# Altium PCB main-pcb.PcbDoc
Units mm, origin at the board's own origin, x right, y up, seen from the top; angles counter-clockwise.
Board outline 36.83 x 18.16 mm, 2 copper layers (Top Layer, Bottom Layer); 12 components, 10 nets, 45 pads, 6 vias.
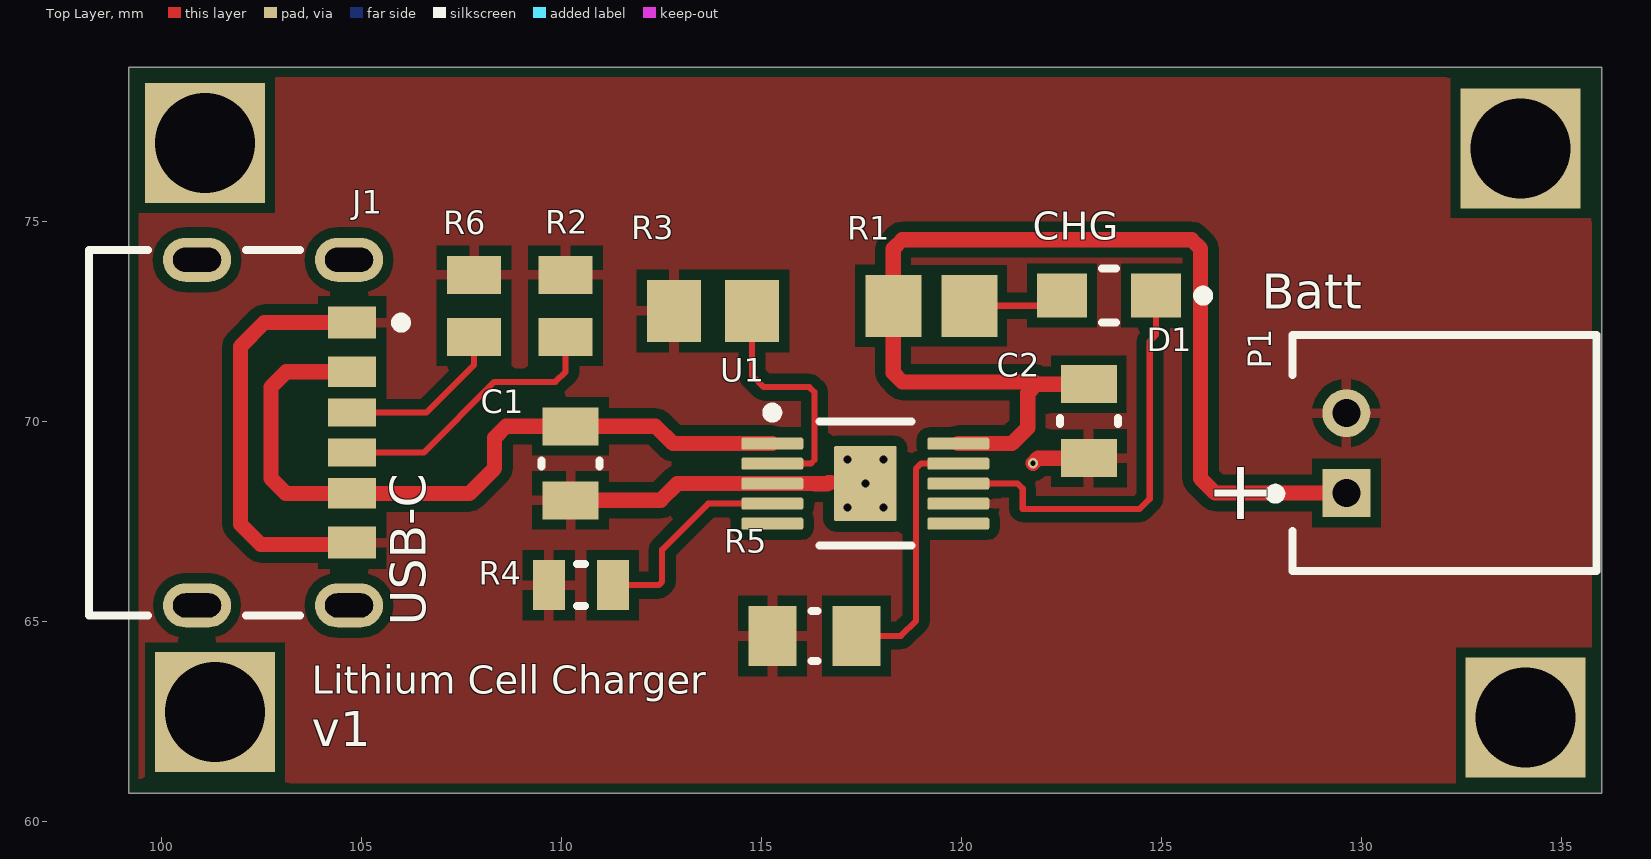
[diagram p0: Top Layer view]
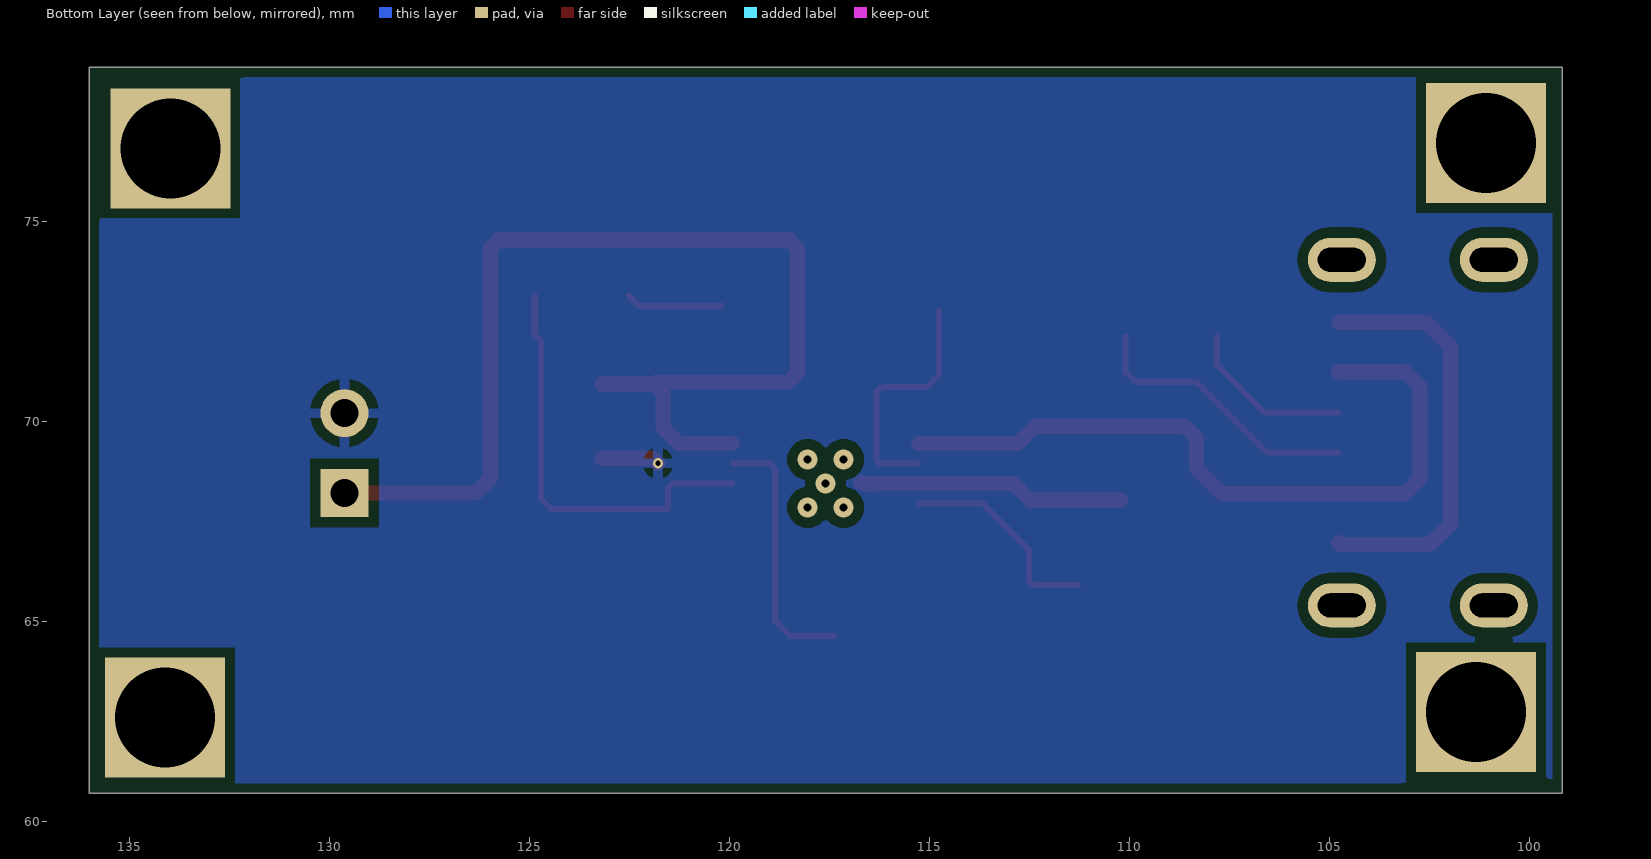
[diagram p1: Bottom Layer view, seen from below]
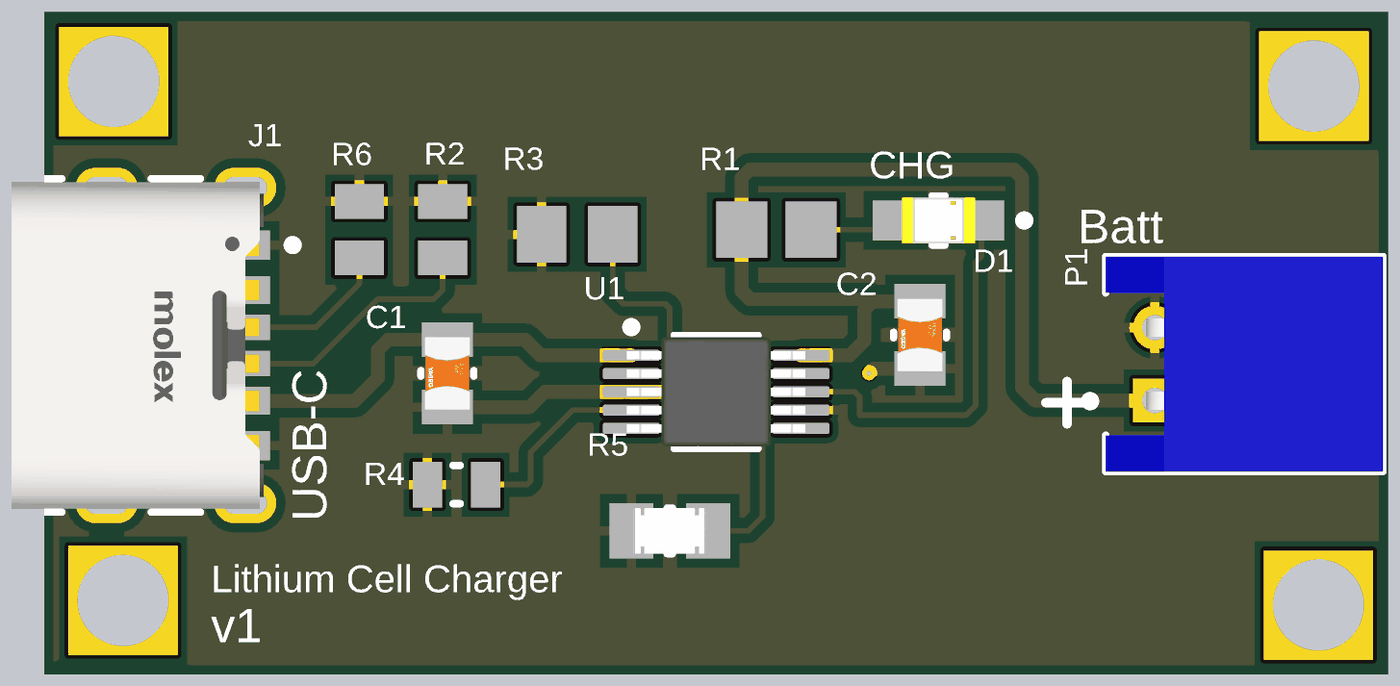
[diagram p2: 3D render of the assembled board from above, using the file's embedded part models]

## Layer stack, top to bottom
Top Solder: solder mask 0.0102, Solder Resist, Dk 3.5
Top Layer: signal copper 0.0356
Dielectric 1: dielectric 0.32, FR-4, Dk 4.8
Bottom Layer: signal copper 0.0356
Bottom Solder: solder mask 0.0102, Solder Resist, Dk 3.5

## Board outline
99.187,60.706 136.017,60.706 136.017,78.867 99.187,78.867

## Design rules (kind name [scope] priority, off if disabled: settings)
Clearance [All] p1: gap=0.254 ignorepadtopadclearanceinfootprint=TRUE except(0: Arc-Hole Track-Hole SMDPad-Hole THPad-Hole Via-Hole Fill-Hole Poly-Hole Region-Hole Text-Hole; 0.12: SMDPad-Region; 0.127: Arc-SMDPad Arc-THPad Track-SMDPad Track-THPad SMDPad-SMDPad SMDPad-THPad; 0.13: Track-Region; 0.2: Arc-Arc Arc-Track Track-Track)
PolygonConnect [All] p1: connectstyle=Relief reliefconductorwidth=0.254 reliefentries=4 polygonreliefangle="90 Angle" airgapwidth=0.254
RoutingVias [All] p1: holewidth=0.711 width=1.27 viastyle="Through Hole" minholewidth=0.711 minwidth=1.27 maxholewidth=0.711 maxwidth=1.27
SolderMaskExpansion [All] p1: expansion=0.102 istentingtop=FALSE
Width power [InNetClass('power')] p1: maxlimit=0.381 minlimit=0.381 preferedwidth=0.381 minimp=50.000000 maximp=50.000000 favimp=50.000000
Width [InNet('No Net')] p2: maxlimit=0.254 minlimit=0.254 preferedwidth=0.254
30 further rules are at their usual default settings.

## Classes and differential pairs
net class power: GND VBUS VOUT

## Components (designator, comment, footprint, x,y, rotation, side; value= is the part's Value field where it differs from the comment)
C1 "1uF" FP-CC0805-0_85-MFG 110.236,68.961 r270 top value="1 uF"
C2 "1uF" FP-CC0805-0_85-MFG 123.19,70.013 r270 top value="1 uF"
D1 "GREEN" FP-SML-210-MFG 123.698,73.152 r180 top
J1 "217175-0001" FP-217175-0001-MFG 101.745,69.727 r270 top
P1 "Batt-conn" JST-S2B-PH-K-S_V 132.08,69.215 r90 top
R1 "1.5k" RESC2013X60X40ML20T25 119.253,72.898 r0 top
R2 "5.1k" RESC2013X70X40LL20T20 110.109,72.898 r270 top
R3 "1k" RESC2013X70X40ML20T20 113.794,72.771 r0 top
R4 "2k" RESC2013X60X35LL10T20 110.49,65.913 r0 top
R5 "10k" FP-CRCW0805-e3-IPC_A 116.332,64.643 r0 top
R6 "5.1k" RESC2013X70X40LL20T20 107.823,72.898 r270 top
U1 "BQ24092DGQT" DGQ0010D_M 117.602,68.453 r0 top

## Footprints (in the part's own frame and the unit in brackets; to place one, negate y for a bottom-side part, rotate by r counter-clockwise, add the part's x,y. Pads: shape width x height; smd on the part's side, far side on the other; paste and mask are expansions set on the pad)
DGQ0010D_M [mm] "TSOP, 10-Leads, Body 3.1x3.1mm, Pitch 0.5mm, Thermal Pad 1.88x1.57mm, IPC Low Density"
  rrect33% 1.55x0.3 smd: 1(-2.325,1) 2(-2.325,0.5) 3(-2.325,0) 4(-2.325,-0.5) 5(-2.325,-1) 6(2.325,-1) 7(2.325,-0.5) 8(2.325,0) 9(2.325,0.5) 10(2.325,1)
  rrect6% 1.57x1.88 smd: 11(0,0)
  silkscreen extent -2.45,-1.55 1.15,1.9, body extent -2.45,-1.5 2.45,1.5, height 0.94
FP-217175-0001-MFG [mm]
  rrect100% 1.1x1.7 hole 1.2 slot 0.6 at 0 deg paste-1000 mask+0: 1(-4.32,2.95) 2(4.32,2.95) 3(-4.32,-0.85) 4(4.32,-0.85)
  rect 0.7x1.2 smd paste+0 mask+0: A5(-0.5,3.03) B5(0.5,3.03)
  rect 0.76x1.2 smd paste+0 mask+0: A9(1.52,3.03) B9(-1.52,3.03)
  rect 0.8x1.2 smd paste+0 mask+0: A12(2.75,3.03) B12(-2.75,3.03)
  silkscreen extent -4.57,-3.55 4.57,4.38, body extent -4.97,-3.65 4.97,3.9, height 0.25
FP-CC0805-0_85-MFG [mm]
  rect 0.95x1.4 smd paste+0 mask+0: 1(-0.925,0) 2(0.925,0)
  silkscreen extent -0.08,-0.72 0.08,0.72, body extent -1.6,-1.05 1.6,1.05, height 0.25
FP-CRCW0805-e3-IPC_A [mil]
  rect 47.5x59.38 smd paste+0 mask+0: 1(-41.37,0) 2(41.37,0)
  silkscreen extent -3,-25 3,25, body extent -85,-49 85,49, height 10
FP-SML-210-MFG [mm]
  rect 1.25x1.1 smd paste+0 mask+0: 1(-1.175,0) 2(1.175,0)
  silkscreen extent -2.48,-0.67 0.18,0.67, body extent -1.9,-0.77 1.9,0.77, height 0.25
JST-S2B-PH-K-S_V [mm] "THD, 2-Leads, Body 7.6x5.9mm, Pitch 2mm"
  rect 1.2x1.2 hole 0.7: 1(-1,2.45)
  round 1.2 hole 0.7: 2(1,2.45)
  silkscreen extent -2.95,-3.8 2.95,4.35, body extent -2.95,-3.8 2.95,3.8, height 4.8
RESC2013X60X35LL10T20 [mm] "Chip Resistor, 2-Leads, Body 2.00x1.25mm, IPC High Density"
  rect 0.8x1.25 smd: 1(-0.8,0) 2(0.8,0)
  silkscreen extent -0.1,-0.53 0.1,0.53, body extent -1.05,-0.67 1.05,0.67, height 0.6
RESC2013X60X40ML20T25 [mm] "Chip Resistor, 2-Leads, Body 2.00x1.25mm, IPC Low Density"
  rect 1.4x1.55 smd: 1(-0.95,0) 2(0.95,0)
  body extent -1.1,-0.72 1.1,0.72, height 0.6
RESC2013X70X40LL20T20 [mm] "Chip Resistor, 2-Leads, Body 2.00x1.25mm, IPC High Density"
  rect 0.95x1.35 smd: 1(-0.775,0) 2(0.775,0)
  body extent -1.1,-0.72 1.1,0.72, height 0.7
RESC2013X70X40ML20T20 [mm] "Chip Resistor, 2-Leads, Body 2.00x1.25mm, IPC Low Density"
  rect 1.35x1.55 smd: 1(-0.975,0) 2(0.975,0)
  body extent -1.1,-0.72 1.1,0.72, height 0.7

## Part data
C1 C2: library part CMP-03422-000001-1, "CAP CER 1UF 16V X7R 0805", Capacitance="1 uF", Manufacturer=Yageo, Manufacturer Part Number=CC0805KKX7R7BB105, Package=CC0805-0.85, Temperature="-30°C to +85°C", Temperature Characteristic=X7R, Temperature Range High=+85°C, Temperature Range Low=-30°C, Tolerance=0.1, Voltage Rating="16 V", Automotive=No, Category=Cap, ComponentLink2Description=Datasheet, ComponentLink2URL=http://www.yageo.com/documents/recent/UPY-GPHC_Y5V_6.3V-to-50V_8.pdf, Device Class L1="Passive Components", Device Class L2=Capacitors, Device Class L3="Ceramic Capacitors", Digikey Description="CAP CER 1UF 16V X7R 0805", Footprint Url=http://www.yageo.com/exep/pages/download/literatures/UPY-C_GEN_24.pdf, Height=0.95mm, Ipc Land Pattern Name=CAPC200125X85, Lead Free=Yes, Material=Ceramic, Mouser Description="Multilayer Ceramic Capacitors MLCC - SMD/SMT 1.0uF 16V X7R 10%", Octopart=https://octopart.com/cc0805kkx7r7bb105-yageo-8376555, RoHS=TRUE
D1: library part CMP-08952-000013-1, "LED GREEN CLEAR 0805 SMD", Colour=Green, Forward Current=20mA, Forward Voltage=2.2V, Manufacturer=ROHM, Manufacturer Part Number=SML-210MTT86, Package=SML-210, Power Dissipation=70mW, Reverse Voltage=4V, Temperature="-30°C to +85°C", Temperature Range High=+85°C, Temperature Range Low=-30°C, Automotive=No, Category=Diode, ComponentLink2Description=Datasheet, ComponentLink2URL=https://www.mouser.in/ds/2/348/sml-21-313092.pdf, Device Class L1=Optoelectronics, Device Class L2=LEDs, Device Class L3=unset, Digikey Description="LED GREEN CLEAR 0805 SMD", Height=0.90mm, Ipc Land Pattern Name=DIOCP200125X25, Lead Free=Yes, Led Orientation="Top View", Luminous Intensity=16mcd, Mouser Description="Standard LEDs - SMD GREEN SMD TRANS LENS", Octopart=https://octopart.com/sml-210mtt86-rohm-550711, Peak Emmision Wavelength=573nm, RoHS=TRUE, Wavelength=570nm
J1: library part CMP-04767-000026-1, "CONN RCP USB2.0 C 6+18P SMD RA"
P1: library part CMP-1755-00004-1, "Male Header, Pitch 2 mm, 1 x 2 Position, Height 4.8 mm, Tail Length 3.4 mm, -25 to 85 degC, RoHS, Bulk", Capacitance="10 uF", Case\Package=Radial, Max Operating Temperature="85 degC", Min Operating Temperature="-40 degC", Package Quantity=200, Tolerance=20%, Voltage Rating="50 V", ComponentLink1Description=Datasheet, ComponentLink1URL=http://www.jst-mfg.com/product/pdf/eng/ePH.pdf, DatasheetVersion=Dec-12, Diameter="5 mm", Height="11 mm", Lead Pitch="2 mm", Length="11 mm", Mount="Through Hole", PackageDescription="Male Header, Pitch 2 mm, 1 x 2 Position, Height 4.8 mm, Tail Length 3.4 mm", PackageReference=S2B-PH-K-S, Packaging=Bulk, Pins=2, Radiation Hardening=No, REACH SVHC="No SVHC", RoHSCompliant=true, Voltage Rating (DC)="50 V"
R1: library part CMP-2001-00597-1, Manufacturer=Panasonic, Part Number=ERA6AEB152V
R2 R6: library part CMP-2001-00427-1, Manufacturer=Panasonic, Part Number=ERJ-6GEYJ512V
R3: library part CMP-2001-04375-5, "Chip Resistor, 1 KOhm, +/- 1%, 0.125 W, -55 to 155 degC, 0805 (2012 Metric), RoHS, Tape and Reel", Manufacturer=Panasonic, Max Operating Temperature="155 degC", Min Operating Temperature="-55 degC", Package Quantity=1, Voltage Rating="150 V", ComponentLink1Description="Manufacturer URL", ComponentLink1URL=http://www.panasonic.com/, ComponentLink2Description=Datasheet, ComponentLink2URL=http://industrial.panasonic.com/cdbs/www-data/pdf/RDA0000/AOA0000C86.pdf, DatasheetVersion=04/2015, Height="0.6 mm", Length="2 mm", Mount="Surface Mount", Mounting Technology="Surface Mount", PackageDescription="2-Pin Surface Mount Device, Body 2 x 1.25 mm", PackageReference=0805, Packaging="Cut Tape", REACH SVHC=Yes, RoHSCompliant=true
R4: library part CMP-2001-01361-1, Manufacturer=Yageo, Part Number=RC0805JR-072KL
R5: library part CMP-2001-04908-2, "RES Thick Film, 10kΩ, 1%, 0.125W, 100ppm/°C, 0805", Case Code (Imperial)=0805, Case Code (Metric)=2012, Max Operating Temperature=155°C, Min Operating Temperature=-55°C, Package Quantity=5000, Power Rating=125mW, Resistance=10kR, Temperature Coefficient=100ppm/°C, Tolerance=1%, Voltage Rating=150V, Case/Package=0805, Composition="Thick Film", Contact Plating=Tin, Depth=1.25mm, Height=0.45mm, Lead Free="Lead Free", Length=2mm, Military Standard=Not, Packaging="Tape and Reel", Radiation Hardening=No, Termination=SMD/SMT, Voltage Rating (DC)=150V, Weight=0.000194oz, Width=1.25mm
U1: library part CMP-0321-00905-2, "1 A, Single-Input, Single-Cell Li-Ion Battery Charger with Operation Over JEITA and 10 k ohm NTC, 4.5 V, -40 to 150 degC, 10-pin MSOP-PowerPAD (DGQ), Green (RoHS & no Sb/Br)", Manufacturer="Texas Instruments", Over Voltage Protection=N, Code_JEDEC=MO-187-BA-T, ComponentLink1Description=Datasheet, ComponentLink1URL=http://www.ti.com/general/docs/lit/getliterature.tsp?genericPartNumber=BQ24092&fileType=pdf, DatasheetVersion=SLUS968C, Eco-Plan="Green (RoHS & no Sb/Br)", Lead Acid=N, Li-Ion=N, Li-Polymer=N, Mounting Technology="Surface Mount", NiCd=N, NiMH=N, PackageDescription="10-Pin PowerPAD Plastic Small Outline 0.5 mm Pitch, Exposed Pad", PackageReference=DGQ0010D, PackageVersion="revF, Nov-2011", PartNumber=BQ24092DGQT, SubFamily="Battery Charge Management", Vin(Min)(V)=4.5

## Free pads (board coordinates)
  rect 3x3 hole 2.5: 2(101.092,76.962) 2(101.346,62.738) 2(133.985,76.835) 2(134.112,62.611)

## Via types
v1: diameter 0.5, hole 0.2, Top Layer to Bottom Layer, 5 vias
v2: diameter 0.254, hole 0.127, Top Layer to Bottom Layer, 1 vias

## Nets (pads, with @x,y where several pads share a name; then routed paths per layer and width w, separated by ;. In a path a pad name is that pad's centre, name@x,y a point inside that pad or via, vN(x,y) a via of type N, cw(c..) or ccw(c..) an arc to the next point about the centre after c; other vN are vias at no path point)
GND: C1.2 C2.2 J1.A12 J1.B12 P1.2 R2.1 R3.1 R4.1 R5.1 R6.1 U1.3 U1.7 U1.11 | length 18.7
  Top Layer w0.381: J1.A12 104.727,66.929 102.489,66.929 101.981,67.437 101.981,71.882 102.576,72.477 J1.B12 ; C1.2 112.486,68.036 112.903,68.453 U1.3 116.332,68.453 116.336,68.449 116.652,68.449 116.685,68.481 116.741,68.481 ; v2(121.793,68.961) 121.92,69.088 C2.2
NetD1_1: D1.1 U1.8 | length 10.6
  Top Layer w0.152: U1.8 121.412,68.453 121.539,68.326 121.539,67.818 124.46,67.818 124.714,68.072 124.714,72.009 124.873,72.168 D1.1
NetD1_2: D1.2 R1.2 | length 2.4
  Top Layer w0.152: R1.2 122.269,72.898 D1.2
NetJ1_A5: J1.A5 R6.2 | length 4.2
  Top Layer w0.152: J1.A5 106.631,70.227 107.823,71.419 R6.2
NetJ1_B5: J1.B5 R2.2 | length 7
  Top Layer w0.152: J1.B5 106.565,69.227 108.331,70.993 109.855,70.993 110.109,71.247 R2.2
NetR3_2: R3.2 U1.2 | length 6.1
  Top Layer w0.152: R3.2 114.769,71.159 115.062,70.866 116.205,70.866 116.332,70.739 116.332,69.042 116.243,68.953 U1.2
NetR4_2: R4.2 U1.4 | length 5.3
  Top Layer w0.152: R4.2 112.433,65.913 112.522,66.002 112.522,66.802 113.673,67.953 U1.4
NetR5_2: R5.2 U1.9 | length 6.6
  Top Layer w0.152: R5.2 118.491,64.643 118.872,65.024 118.872,68.834 118.991,68.953 U1.9
VBUS: C1.1 J1.A9 J1.B9 U1.1 | length 18.5
  Top Layer w0.381: J1.B9 103.124,71.247 102.743,70.866 102.743,68.58 103.116,68.207 J1.A9 107.704,68.207 108.331,68.834 108.331,69.596 108.621,69.886 C1.1 112.359,69.886 112.792,69.453 U1.1
VOUT: C2.1 P1.1 R1.1 U1.10 | length 28.6
  Top Layer w0.381: U1.10 121.269,69.453 121.666,69.85 121.666,70.715 121.889,70.938 ; C2.1 121.889,70.938 ; P1.1 126.349,68.215 125.984,68.58 125.984,74.326 125.761,74.549 118.526,74.549 118.303,74.326 R1.1 118.303,71.216 118.526,70.993 121.834,70.993 121.889,70.938
pads on no net: J1.1 J1.2 J1.3 J1.4 U1.5 U1.6
copper on no net:
  other v1: 117.152,67.853 118.052,67.853 117.602,68.453 117.152,69.053 118.052,69.053

## Polygon pours and split planes (outlines as drawn)
GND on Bottom Layer "GND_L02_P001" (solid, pour order 1): 99.568,78.613 135.763,78.613 135.763,60.96 99.441,60.96 99.441,78.486
GND on Top Layer "GND_L01_P000" (solid, pour order 0): 99.441,78.613 135.763,78.613 135.763,60.96 99.441,60.96

## Silkscreen, mask and mechanical layers (free items; w line width, h text height)
Top Overlay:
  text "CHG" at 121.793,74.308 h1.2
  text "Batt" at 127.508,72.533 h1.5
  text "+" at 126.111,67.564 h1.52
  text "USB-C" at 106.918,64.897 h1.52 r90
  text "Lithium Cell Charger" at 103.759,62.964 h1.2
  text "v1" at 103.759,61.595 h1.5
Mechanical 1:
  lines w0.254: 99.187,60.706 100.054,60.706 134.716,60.706 136.017,60.706 136.017,62.007 136.017,76.931 136.017,78.867 135.89,78.867 133.456,78.867 100.455,78.867 99.187,78.867 99.187,78.613 99.187,77.439 99.187,76.519 99.187,61.573 99.187,60.706